# EAGLE board iterasi2 (EAGLE 9.5.1)
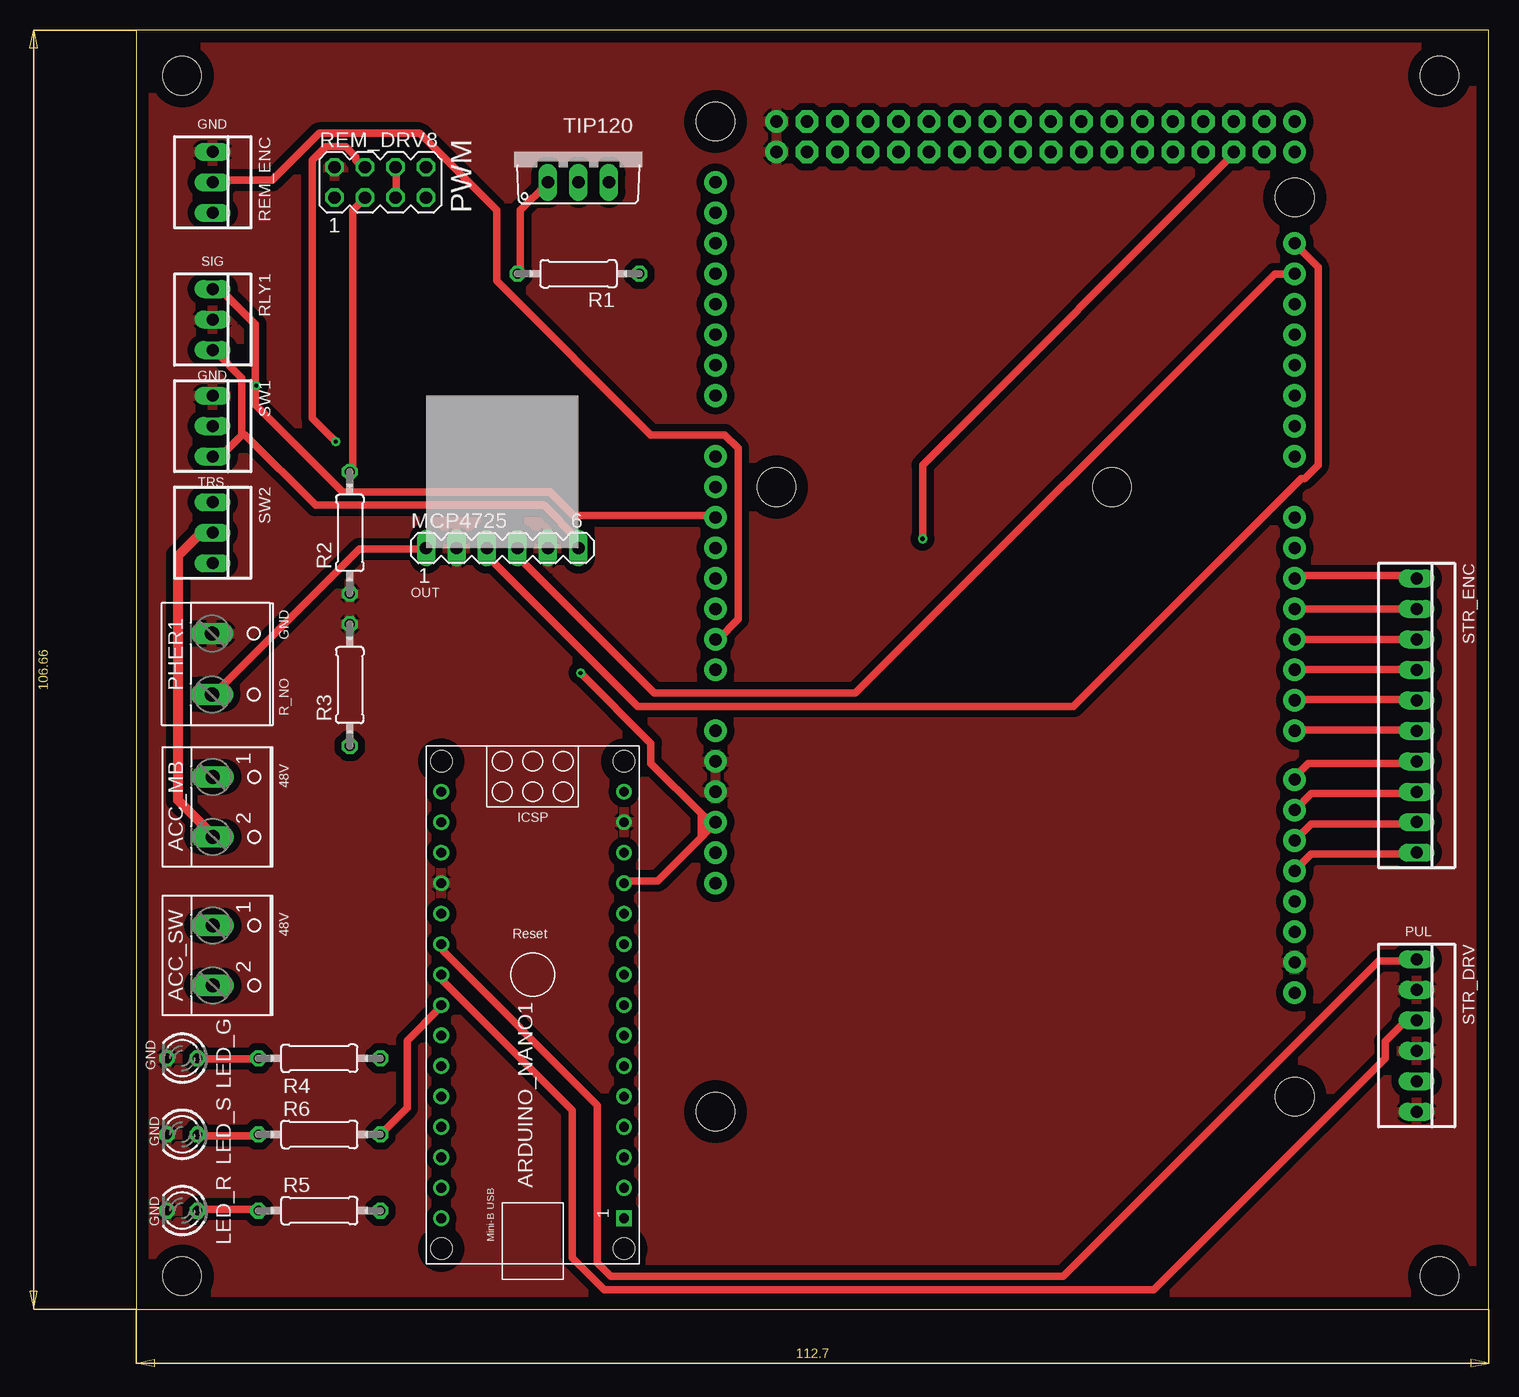
[diagram p0: board, top side]
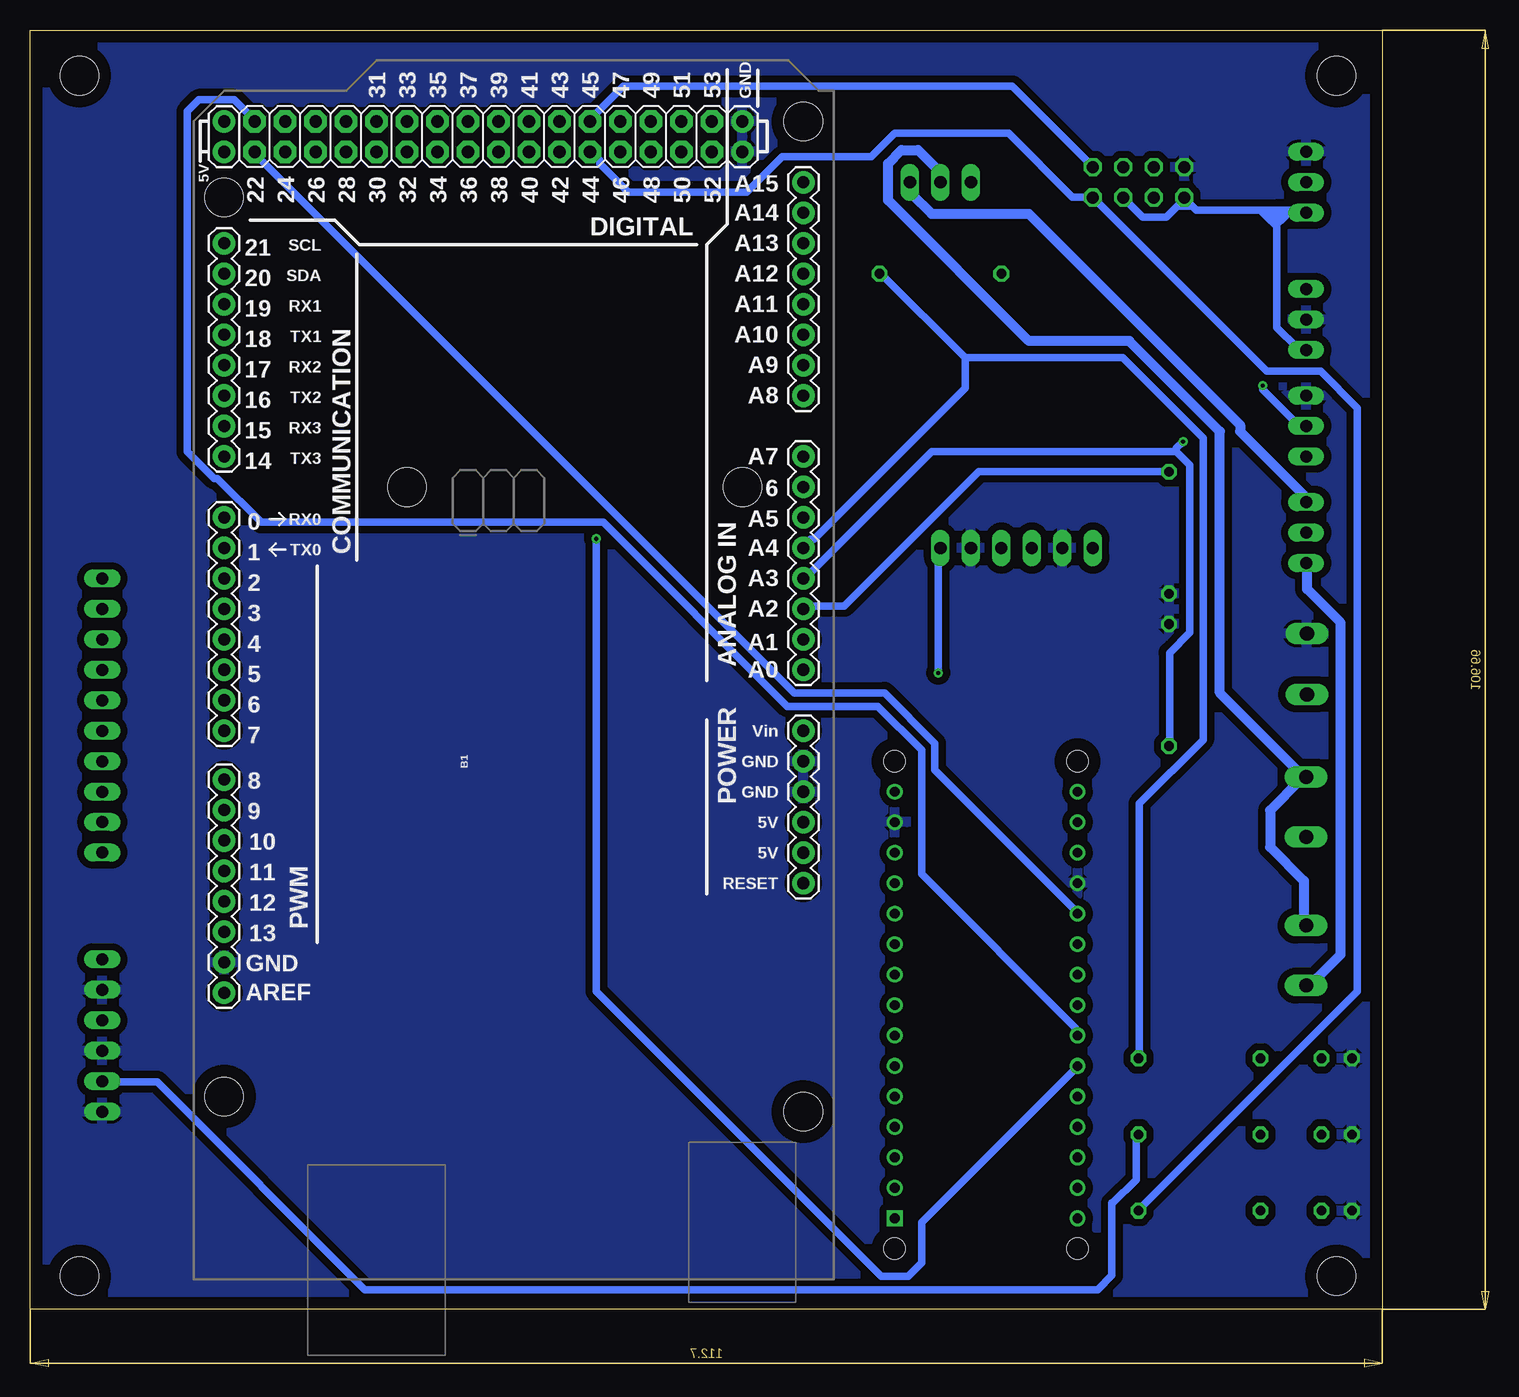
[diagram p1: board, bottom side, seen from below]

Size 112.7 x 106.66 mm. Coordinates in mm from the lower left corner, seen from the top.
Outline: 0,106.66 0,0 112.7,0 112.7,106.66 0,106.66
Copper layers (1*16): Top 0.035mm / dielectric 1.5mm / Bottom 0.035mm
Design rules "default": minimum track width 6mil, minimum drill 0.35mm, track to track 6mil, track to pad 6mil, pad to pad 6mil, via to via 6mil, smd to smd 6mil, copper to edge 40mil, drill to drill 6mil, minimum pad ring 10mil, minimum via ring 8mil, stop-mask expansion 4mil, vias tented up to drill 0mil, thermal gap 10mil
Net classes: 0 default: width 0.61 mm, clearance 0.508 mm; 1 GND: width 0.813 mm, clearance 0.61 mm; 2 48V: width 0.813 mm, clearance 0.61 mm
Holes 3.2 mm at 3.81,2.77 3.81,102.85 108.59,102.85 108.59,2.77

## Footprints (pad centres in the part's own frame; a part is rotated, then mirrored left to right if it is on the bottom)
W237-102 = drill 1.194 long: 1 -2.5,-1.27; 2 2.5,-1.27
ARDUINO_NANO = drill 0.8 square: 1 -20.32,-7.62 | drill 0.8: 2 -17.78,-7.62; 3 -15.24,-7.62; 4 -12.7,-7.62; 5 -10.16,-7.62; 6 -7.62,-7.62; 7 -5.08,-7.62; 8 -2.54,-7.62; 9 0,-7.62; 10 2.54,-7.62; 11 5.08,-7.62; 12 7.62,-7.62; 13 10.16,-7.62; 14 12.7,-7.62; 15 15.24,-7.62; 16 15.24,7.62; 17 12.7,7.62; 18 10.16,7.62; 19 7.62,7.62; 20 5.08,7.62; 21 2.54,7.62; 22 0,7.62; 23 -2.54,7.62; 24 -5.08,7.62; 25 -7.62,7.62; 26 -10.16,7.62; 27 -12.7,7.62; 28 -15.24,7.62; 29 -17.78,7.62; 30 -20.32,7.62 | hole 1.778: -22.86,-7.62; -22.86,7.62; 17.78,7.62; 17.78,-7.62
ARDUINO_MEGA = drill 1.016 pad 1.88: 0 13.97,24.13; 1 11.43,24.13; 2 8.89,24.13; 3 6.35,24.13; 3.3V -13.97,-24.13; 4 3.81,24.13; 5 1.27,24.13; 5V@0 -11.43,-24.13; 5V@1 44.45,24.13; 5V@2 46.99,24.13; 6 -1.27,24.13; 7 -3.81,24.13; 8 -7.874,24.13; 9 -10.414,24.13; 10 -12.954,24.13; 11 -15.494,24.13; 12 -18.034,24.13; 13 -20.574,24.13; 14 19.05,24.13; 15 21.59,24.13; 16 24.13,24.13; 17 26.67,24.13; 18 29.21,24.13; 19 31.75,24.13; 20 34.29,24.13; 21 36.83,24.13; A0 1.27,-24.13; A1 3.81,-24.13; A2 6.35,-24.13; A3 8.89,-24.13; A4 11.43,-24.13; A5 13.97,-24.13; A6 16.51,-24.13; A7 19.05,-24.13; A8 24.13,-24.13; A9 26.67,-24.13; A10 29.21,-24.13; A11 31.75,-24.13; A12 34.29,-24.13; A13 36.83,-24.13; A14 39.37,-24.13; A15 41.91,-24.13; AREF -25.654,24.13; GND@0 -8.89,-24.13; GND@1 -6.35,-24.13; GND@2 44.45,-19.05; GND@3 46.99,-19.05; GND@4 -23.114,24.13; RESET -16.51,-24.13; VIN -3.81,-24.13 | drill 1.016 pad 1.88 octagon: 22 44.45,21.59; 23 46.99,21.59; 24 44.45,19.05; 25 46.99,19.05; 26 44.45,16.51; 27 46.99,16.51; 28 44.45,13.97; 29 46.99,13.97; 30 44.45,11.43; 31 46.99,11.43; 32 44.45,8.89; 33 46.99,8.89; 34 44.45,6.35; 35 46.99,6.35; 36 44.45,3.81; 37 46.99,3.81; 38 44.45,1.27; 39 46.99,1.27; 40 44.45,-1.27; 41 46.99,-1.27; 42 44.45,-3.81; 43 46.99,-3.81; 44 44.45,-6.35; 45 46.99,-6.35; 46 44.45,-8.89; 47 46.99,-8.89; 48 44.45,-11.43; 49 46.99,-11.43; 50 44.45,-13.97; 51 46.99,-13.97; 52 44.45,-16.51; 53 46.99,-16.51 | hole 3.2: -34.29,24.13; -35.56,-24.13; 16.51,8.89; 16.51,-19.05; 40.64,24.13; 46.99,-24.13
LED3MM = drill 0.813 octagon: A -1.27,0; K 1.27,0
MA06-1 = drill 1.016 long: 1 -6.35,0; 2 -3.81,0; 3 -1.27,0; 4 1.27,0; 5 3.81,0; 6 6.35,0
W237-132 = drill 1.194 long: 1 -2.54,-0.635; 2 2.54,-0.635
0207/10 = drill 0.813 octagon: 1 -5.08,0; 2 5.08,0
MA04-2 = drill 1.016 octagon: 1 -3.81,-1.27; 2 -3.81,1.27; 3 -1.27,-1.27; 4 -1.27,1.27; 5 1.27,-1.27; 6 1.27,1.27; 7 3.81,-1.27; 8 3.81,1.27
22-23-2031 = drill 1 long: 1 -2.54,0; 2 0,0; 3 2.54,0
22-23-2061 = drill 1 long: 1 -6.35,0; 2 -3.81,0; 3 -1.27,0; 4 1.27,0; 5 3.81,0; 6 6.35,0
22-23-2101 = drill 1 long: 1 -11.43,0; 2 -8.89,0; 3 -6.35,0; 4 -3.81,0; 5 -1.27,0; 6 1.27,0; 7 3.81,0; 8 6.35,0; 9 8.89,0; 10 11.43,0
TO220AV = drill 1.016 long: B -2.54,-2.54; C 0,-2.54; E 2.54,-2.54

## Placement (x,y rotation side)
ACC_MB  [W237-102]  7.62,41.89 270 top
ACC_SW  [W237-102]  7.62,29.51 270 top
ARDUINO_NANO1  [ARDUINO_NANO]  33.02,27.92 90 top
B1  ARDUINO_MEGA_R3FULL  [ARDUINO_MEGA]  72.39,52.05 90 bottom
LED_G  TLLY4400  [LED3MM]  3.81,20.93 180 top
LED_R  TLLY4400  [LED3MM]  3.81,8.24 180 top
LED_S  TLLY4400  [LED3MM]  3.81,14.59 180 top
MCP4725  [MA06-1]  30.48,63.48 0 top
PHER1  GND_TPS/RELAY_NO  [W237-132]  6.92,53.81 270 top
R1  5k1  [0207/10]  36.83,86.34 180 top
R2  680  [0207/10]  17.78,64.75 90 top
R3  680  [0207/10]  17.78,52.05 90 top
R4  220  [0207/10]  15.24,20.93 0 top
R5  220  [0207/10]  15.24,8.24 0 top
R6  220  [0207/10]  15.24,14.59 0 top
REM_DRV  [MA04-2]  20.32,93.96 0 top
REM_ENC  22-23-2031  [22-23-2031]  6.35,93.96 270 top
RLY1  22-23-2031  [22-23-2031]  6.35,82.53 270 top
STR_DRV  [22-23-2061]  106.68,22.84 270 top
STR_ENC  22-23-2101  [22-23-2101]  106.68,49.51 270 top
SW1  22-23-2031  [22-23-2031]  6.35,73.64 270 top
SW2  22-23-2031  [22-23-2031]  6.35,64.75 270 top
TIP120  TIP41C  [TO220AV]  36.83,96.5 0 top

## Library data of the parts
ACC_MB ACC_SW = con-wago-500; MPN: 237-102; OC_FARNELL: unknown; OC_NEWARK: 70K9898
ARDUINO_NANO1 = ArduinoNanoV30
B1 = SparkFun-Boards
LED_G LED_R LED_S = led; MF: VISHAY SEMICONDUCTOR; OC_FARNELL: 1612439
MCP4725 REM_DRV = con-lstb; OC_FARNELL: unknown; OC_NEWARK: unknown
PHER1 = con-wago-508; OC_FARNELL: unknown; OC_NEWARK: unknown
R1-R6 = rcl; SPICEPREFIX: R
REM_ENC RLY1 SW1 SW2 = con-molex; MF: MOLEX; MPN: 22-23-2031; OC_FARNELL: 1462950; OC_NEWARK: 30C0862
STR_DRV = con-molex; MF: MOLEX; MPN: 22-23-2061; OC_FARNELL: 1462922; OC_NEWARK: 27C1933
STR_ENC = con-molex; MF: MOLEX; MPN: 22-23-2101; OC_FARNELL: 1756828; OC_NEWARK: 94C0765
TIP120 = transistor-power

## Nets
5V: ARDUINO_NANO1.12 B1.5V@0 MCP4725.6 REM_DRV.1 REM_DRV.5 REM_DRV.6 REM_ENC.3 RLY1.3 SW1.3
48V [48V]: ACC_MB.1 ACC_SW.1 TIP120.C
F_MODE: B1.A5 RLY1.1 SW1.2
GAS_EN: B1.A4 R1.1 R4.2
GAS_SIG: MCP4725.1 PHER1.2
GND [GND]: ARDUINO_NANO1.14 ARDUINO_NANO1.19 B1.GND@0 B1.GND@1 B1.GND@2 B1.GND@3 B1.GND@4 LED_G.K LED_R.K LED_S.K MCP4725.2 MCP4725.5 PHER1.1 R2.1 R3.2 REM_DRV.2 REM_ENC.1 RLY1.2 STR_DRV.2 STR_DRV.4 STR_DRV.6 SW1.1
L_IS: B1.A3 R3.1 REM_DRV.4
L_PWM: B1.45 REM_DRV.8
N$1: R1.2 TIP120.B
N$2 [48V]: SW2.1 TIP120.E
N$4 [48V]: ACC_MB.2 SW2.2
N$5 [48V]: ACC_SW.2 SW2.3
N$7: LED_G.A R4.1
N$8: LED_R.A R5.1
N$9: LED_S.A R6.1
N$10: ARDUINO_NANO1.20 B1.22
N$11: ARDUINO_NANO1.24 B1.23
N$12: ARDUINO_NANO1.25 B1.24
R_IS: B1.A2 R2.2 REM_DRV.3
R_PWM: B1.44 R5.2 REM_DRV.7
REM_ENC: B1.A1 REM_ENC.2
SCL: B1.21 MCP4725.3
SDA: B1.20 MCP4725.4
SEN1: B1.2 STR_ENC.1
SEN2: B1.3 STR_ENC.2
SEN3: B1.4 STR_ENC.3
SEN4: B1.5 STR_ENC.4
SEN5: B1.6 STR_ENC.5
SEN6: B1.7 STR_ENC.6
SEN7: B1.8 STR_ENC.7
SEN8: B1.9 STR_ENC.8
SEN9: B1.10 STR_ENC.9
SEN10: B1.11 STR_ENC.10
STR_DIR: ARDUINO_NANO1.22 STR_DRV.3
STR_ENA: ARDUINO_NANO1.23 R6.2 STR_DRV.5
STR_PUL: ARDUINO_NANO1.21 STR_DRV.1
VIN: ARDUINO_NANO1.15

## Tracks (layer width: path | path; a pad name or v marks a point on that pad's centre or on a via)
5V  (via drill 0.35)
  Top 0.61: REM_DRV.5 21.64,92.74 21.64,94.98 REM_DRV.6 | 47.49,39.8 48.18,40.49 B1.5V@0 47.78,40.62 | 47.49,39.8 47.17,39.48 | 47.17,39.48 43.43,35.74 40.64,35.74 ARDUINO_NANO1.12 | 8.79,72.9 7.11,71.23 6.55,71.23 SW1.3 | 8.79,72.9 8.79,77.65 6.55,79.89 RLY1.3 | MCP4725.6 36.73,63.68 36.73,64.24 33.93,67.04 14.93,67.04 9.07,72.9 8.79,72.9 | v37.01,53.07 42.88,47.2 42.88,45.52 47.07,41.33 | 47.78,40.62 47.07,41.33 | 47.07,41.33 47.07,40.23 | 47.49,39.8 47.07,40.23 | 47.07,40.23 47.07,39.59 47.17,39.48 | 47.07,40.23 47.46,40.62 47.78,40.62
  Bottom 0.61: 10.16,91.62 15.49,91.62 15.9,92.03 | 10.16,91.62 8.89,91.62 | 7.62,91.62 8.89,91.62 | 7.62,91.62 6.55,91.62 REM_ENC.3 | 15.9,92.03 16.33,92.46 REM_DRV.1 16.51,92.56 17.08,91.99 | REM_DRV.5 19.96,91.06 18.01,91.06 17.08,91.99 | v37.01,53.07 37.01,63.4 MCP4725.6 | RLY1.3 6.55,80.17 7.11,80.17 8.79,81.84 8.79,90.45 | 7.62,91.62 8.36,90.89 | 8.36,90.89 8.79,90.45 | 8.79,90.45 8.99,90.45 9.42,90.89 | 9.42,90.89 10.16,91.62 | 8.79,90.45 8.89,90.56 8.89,91.42 | 8.89,91.62 9.42,91.09 9.42,90.89 | 8.89,91.62 8.89,91.42 | 8.89,91.42 8.36,90.89 | 15.9,92.03 15.94,91.99 17.08,91.99
48V
  Bottom 0.813: TIP120.C 37.01,94.14 37.01,94.98 38.68,96.65 40.08,96.65 41.2,95.54 41.2,92.46 29.46,80.73 21.08,80.73 13.54,73.18 13.54,51.39 6.55,44.4 ACC_MB.1 6.83,44.12 9.35,41.61 9.35,38.54 6.55,35.74 6.55,32.15 ACC_SW.1
F_MODE  (via drill 0.35)
  Top 0.61: 5.44,84.92 6.27,84.92 RLY1.1 6.55,84.92 7.11,84.92 | 7.11,84.92 9.91,82.12 9.91,75.42 17.17,68.15 34.49,68.15 36.45,66.2 48.18,66.2 B1.A5 | v9.98,77.02 9.91,77.09 9.91,82.09 7.11,84.88 7.11,84.92
  Bottom 0.61: SW1.2 6.82,73.64 6.87,73.59 9.98,76.7 v9.98,77.02
GAS_EN
  Bottom 0.61: 34.77,79.33 21.64,79.33 14.93,72.62 14.93,47.48 20.24,42.17 20.24,21.19 R4.2 | 34.77,79.33 41.76,86.31 R1.1 | 34.77,79.33 34.77,76.81 47.35,64.24 47.62,64.24 48.18,63.68 B1.A4
GAS_SIG
  Top 0.61: MCP4725.1 23.88,63.4 18.57,63.4 6.55,51.39 PHER1.2
GND
  pour Top: 0,109.2 114.3,109.2 115.57,107.93 115.57,-3.83 0,-3.83 -3.81,-0.02 -3.81,105.39
  pour Bottom: 0,114.28 115.57,114.28 118.11,111.74 118.11,-8.91 116.84,-10.18 0,-10.18 -8.89,-1.29 -8.89,104.12
L_IS  (via drill 0.35)
  Top 0.61: v16.61,72.34 14.66,74.3 14.66,95.81 15.77,96.93 17.45,96.93 18.29,96.09 18.29,95.81 18.85,95.26 REM_DRV.4
  Bottom 0.61: 17.17,71.51 16.05,70.39 16.05,56.42 17.73,54.74 17.73,47.2 R3.1 | 17.17,71.51 37.57,71.51 48.18,60.89 B1.A3 | v16.61,72.34 17.17,71.79 17.17,71.51
L_PWM
  Bottom 0.61: REM_DRV.8 24.16,95.26 24.13,95.26 30.84,101.96 63.27,101.96 66.06,99.17 B1.45
N$1
  Top 0.61: R1.2 31.98,86.59 31.98,91.62 34.21,93.86 TIP120.B
N$2
  Bottom 0.813: SW2.1 6.55,67.31 6.55,67.87 11.86,73.18 11.86,73.74 29.46,91.34 37.57,91.34 39.24,93.02 39.24,93.86 TIP120.E
N$4
  Top 0.813: SW2.2 6.27,64.52 5.16,64.52 3.48,62.84 3.48,42.45 6.27,39.65 ACC_MB.2
N$5
  Bottom 0.813: SW2.3 6.27,62.01 6.27,60.05 3.48,57.26 3.48,29.6 5.48,27.6 ACC_SW.2
N$7
  Top 0.61: LED_G.A 5.16,20.91 9.91,20.91 R4.1
N$8
  Top 0.61: LED_R.A 5.16,8.34 9.91,8.34 R5.1
N$9
  Top 0.61: LED_S.A 5.16,14.48 9.91,14.48 R6.1
N$10
  Bottom 0.61: ARDUINO_NANO1.20 25.55,33.23 37.29,44.96 37.29,47.2 41.48,51.39 49.02,51.39 94.01,96.37 B1.22
N$11
  Bottom 0.61: ARDUINO_NANO1.24 25.55,22.89 25.55,23.45 38.4,36.3 38.4,46.64 42.04,50.27 49.58,50.27 64.95,65.64 93.45,65.64 97.08,69.27 97.36,69.27 99.59,71.51 99.59,99.88 98.63,100.84 95.68,100.84 94.01,99.17 B1.23
N$12  (via drill 0.35)
  Top 0.61: v65.51,64.24 65.51,70.39 91.49,96.37 B1.24
  Bottom 0.61: v65.51,64.24 65.51,26.52 41.76,2.77 39.52,2.77 38.4,3.89 38.4,7.24 25.55,20.1 ARDUINO_NANO1.25
R_IS
  Top 0.61: R2.2 18.01,69.83 18.01,91.62 18.85,92.46 REM_DRV.3
  Bottom 0.61: R2.2 33.65,69.83 44.83,58.65 48.18,58.65 B1.A2
R_PWM
  Bottom 0.61: R5.2 20.24,8.34 2.08,26.5 2.08,75.14 5.16,78.21 9.63,78.21 23.88,92.46 REM_DRV.7 24.43,92.74 25.83,92.74 31.14,98.05 40.64,98.05 42.6,96.09 50.01,96.09 52.96,93.15 62.84,93.15 65.23,95.54 65.23,95.81 65.79,96.37 B1.44
REM_ENC
  Top 0.61: REM_ENC.2 6.55,94.14 11.3,94.14 15.21,98.05 23.6,98.05 30.02,91.62 30.02,85.76 42.88,72.9 49.02,72.9 50.14,71.79 50.14,57.54 48.46,55.86 B1.A1
SCL
  Top 0.61: MCP4725.3 29.46,63.4 29.46,62.57 41.76,50.27 78.08,50.27 97.08,69.27 97.36,69.27 98.48,70.39 98.48,86.87 96.52,88.83 B1.21
SDA
  Top 0.61: MCP4725.4 31.98,63.4 31.98,62.57 43.15,51.39 59.92,51.39 94.84,86.31 96.52,86.31 B1.20
SEN1
  Top 0.61: STR_ENC.1 106.58,61.17 96.52,61.17 B1.2
SEN2
  Top 0.61: STR_ENC.2 106.58,58.38 96.52,58.38 B1.3
SEN3
  Top 0.61: B1.4 STR_ENC.3
SEN4
  Top 0.61: STR_ENC.4 106.58,53.34 96.52,53.34 B1.5
SEN5
  Top 0.61: STR_ENC.5 106.58,50.83 96.52,50.83 B1.6
SEN6
  Top 0.61: STR_ENC.6 106.58,48.32 96.52,48.32 B1.7
SEN7
  Top 0.61: STR_ENC.7 106.58,45.52 97.64,45.52 96.52,44.4 B1.8
SEN8
  Top 0.61: STR_ENC.8 106.58,43.01 97.92,43.01 96.52,41.61 B1.9
SEN9
  Top 0.61: B1.10 97.92,40.49 106.58,40.49 STR_ENC.9
SEN10
  Top 0.61: STR_ENC.10 106.58,37.98 97.92,37.98 96.52,36.58 B1.11
STR_DIR
  Top 0.61: ARDUINO_NANO1.22 25.55,27.92 25.55,27.36 36.33,16.58 36.33,4.29 38.96,1.66 84.79,1.66 104.06,20.93 104.06,22.33 105.74,24.01 106.58,24.01 STR_DRV.3
STR_ENA
  Top 0.61: ARDUINO_NANO1.23 25.27,25.13 22.55,22.41 22.55,16.8 20.52,14.76 R6.2
  Bottom 0.61: STR_DRV.5 106.58,18.98 102.11,18.98 84.79,1.66 23.72,1.66 22.54,2.84 22.54,8.87 22.47,8.87 20.52,10.81 20.52,14.48 R6.2
STR_PUL
  Top 0.61: ARDUINO_NANO1.21 25.55,30.43 25.55,29.88 38.4,17.02 38.4,3.89 39.52,2.77 77.24,2.77 103.51,29.04 106.58,29.04 STR_DRV.1

## Text on the board
tNames: GND | PWM | SIG | GND | TRS | OUT | GND | R_NO | 48V | 48V | PUL | GND | GND | GND